# EAGLE board Station_lithobius_motenio_usb (EAGLE 9.5.2)
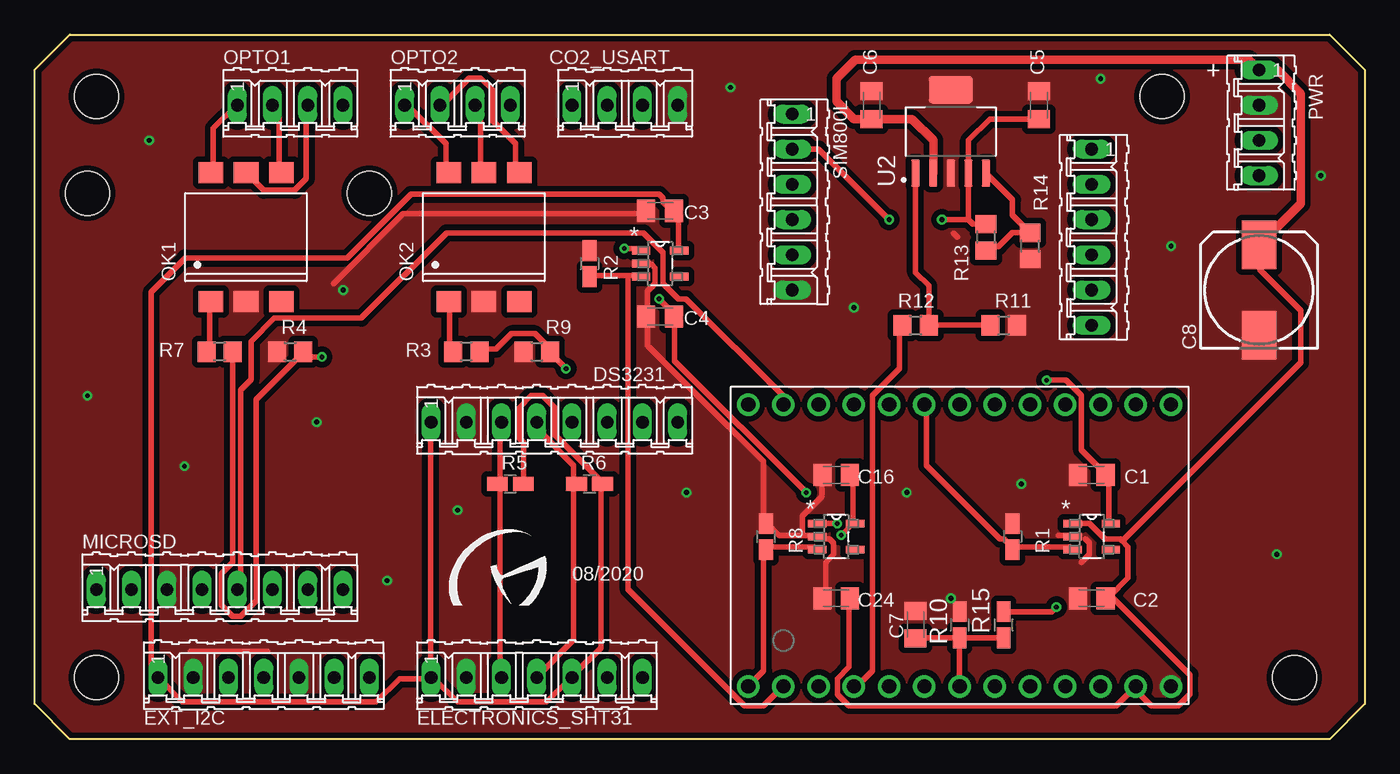
[diagram p0: board, top side]
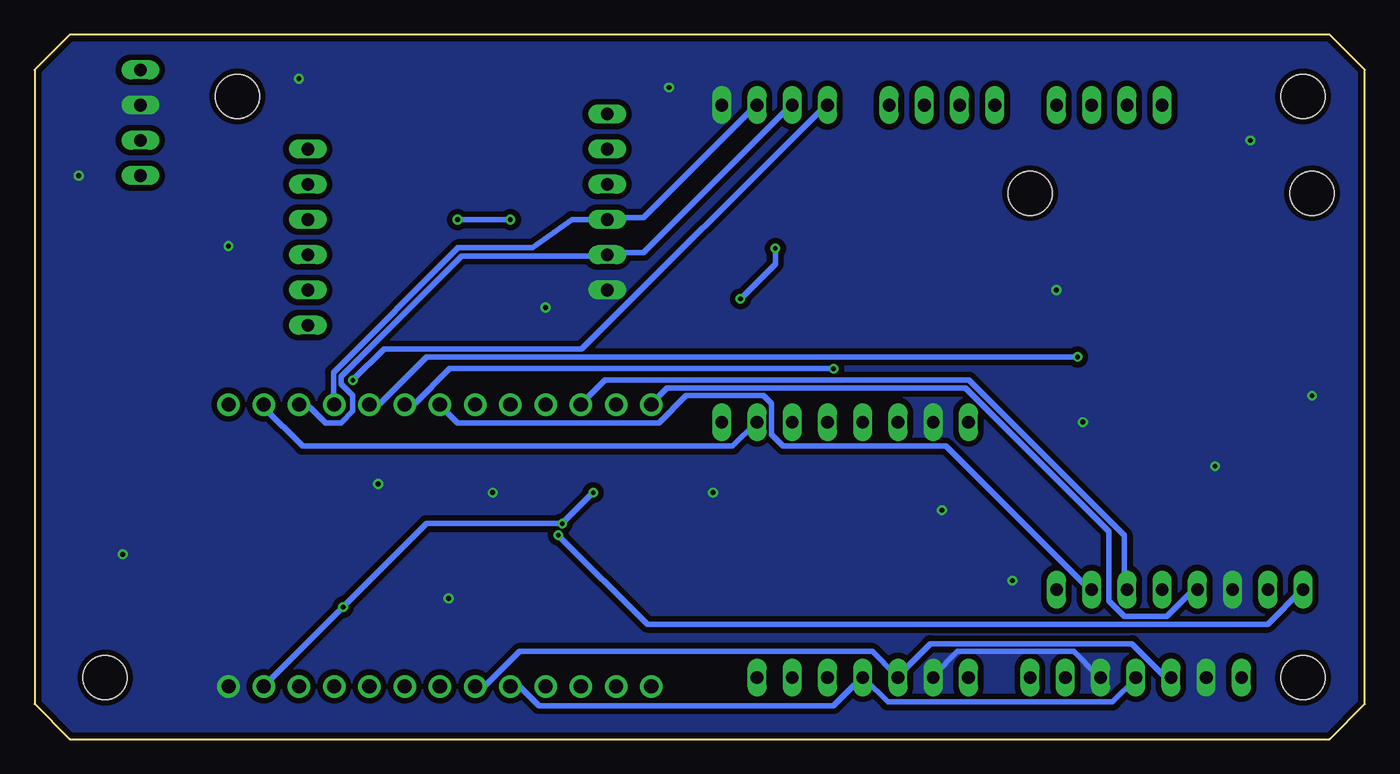
[diagram p1: board, bottom side, seen from below]

Size 95.89 x 50.8 mm. Coordinates in mm from the lower left corner, seen from the top.
Outline: 2.54,50.8 93.34,50.8 95.89,48.26 95.89,2.54 93.34,0 2.54,0 0,2.54 0,48.26 2.54,50.8
Copper layers (1*16): Top 0.0356mm / dielectric 1.5011mm / Bottom 0.0356mm
Design rules "LaenPCBOrder *": minimum track width 16mil, minimum drill 13mil, track to track 6mil, track to pad 6mil, pad to pad 6mil, via to via 6mil, smd to smd 6mil, copper to edge 15mil, drill to drill 6mil, minimum pad ring 7mil, minimum via ring 7mil, stop-mask expansion 4mil, vias tented up to drill 0mil, thermal gap 10mil
Holes 3.17 mm at 4.45,4.45 24.13,39.37 81.28,46.36 90.81,4.45 3.81,39.37 4.45,46.36

## Footprints (pad centres in the part's own frame; a part is rotated, then mirrored left to right if it is on the bottom)
C0805K = smd 1.3 x 1.6: 1 -1,0; 2 1,0
153CLV-0810 = smd 3.5 x 2.5: + 3.25,0; - -3.25,0
04P = drill 0.914 long: 1 -3.81,0; 2 -1.27,0; 3 1.27,0; 4 3.81,0
08P = drill 0.914 long: 1 -8.89,0; 2 -6.35,0; 3 -3.81,0; 4 -1.27,0; 5 1.27,0; 6 3.81,0; 7 6.35,0; 8 8.89,0
07P = drill 0.914 long: 1 -7.62,0; 2 -5.08,0; 3 -2.54,0; 4 0,0; 5 2.54,0; 6 5.08,0; 7 7.62,0
DIL6-SMD = smd 1.78 x 1.52: 1 -2.54,-4.645; 2 0,-4.645; 3 2.54,-4.645; 4 2.54,4.645; 5 0,4.645; 6 -2.54,4.645
R2012W = smd 1.5 x 1: 1 -0.94,0; 2 0.94,0
R0805 = smd 1.3 x 1.5: 1 -0.95,0; 2 0.95,0
06P = drill 0.914 long: 1 -6.35,0; 2 -3.81,0; 3 -1.27,0; 4 1.27,0; 5 3.81,0; 6 6.35,0
SOT95P270X145-5N = smd 1.321 x 0.559: 1 -1.372,0.94; 2 -1.372,0; 3 -1.372,-0.94; 4 1.372,-0.94; 5 1.372,0.94
SOT127P706X180-6N = smd 1.97 x 0.62: 1 -3.005,2.54; 2 -3.005,1.27; 3 -3.005,0; 4 -3.005,-1.27; 5 -3.005,-2.54 | smd 1.97 x 3.16: 6 3.005,0
MOTEINO_SIMPLE = drill 1.016 pad 1.626: 3V3 -10.16,10.16; A0 15.24,10.16; A1 12.7,10.16; A2 10.16,10.16; A3 7.62,10.16; A4_SDA 5.08,10.16; A5_SCL 2.54,10.16; A6_ONLY 0,10.16; A7_ONLY -2.54,10.16; D0_RXI -5.08,10.16; D1_TXO -7.62,10.16; D2 -12.7,-10.16; D3 -10.16,-10.16; D4 -7.62,-10.16; D5 -5.08,-10.16; D6 -2.54,-10.16; D7 0,-10.16; D8 2.54,-10.16; D9 5.08,-10.16; D10_SS 7.62,-10.16; D11_MOSI 10.16,-10.16; D12_MISO 12.7,-10.16; D13_SCK 15.24,-10.16; GND1 -15.24,10.16; RST -15.24,-10.16; VIN -12.7,10.16

## Placement (x,y rotation side)
C1  1uF  [C0805K]  76.2,19.05 180 top
C2  1uF  [C0805K]  76.2,10.16 180 top
C3  1uF  [C0805K]  45.09,38.1 180 top
C4  1uF  [C0805K]  45.09,30.48 180 top
C5  10uF  [C0805K]  72.39,45.72 90 top
C6  10uF  [C0805K]  60.32,45.72 90 top
C7  100nF  [C0805K]  63.5,8.25 90 top
C8  [153CLV-0810]  88.27,32.39 90 top
C16  1uF  [C0805K]  57.78,19.05 180 top
C24  1uF  [C0805K]  57.78,10.16 180 top
CO2_USART  [04P]  42.55,45.72 0 top
DS3231  [08P]  37.47,22.86 0 top
ELECTRONICS_SHT31  [07P]  36.2,4.45 0 top
EXT_I2C  [07P]  16.51,4.45 0 top
MICROSD  [08P]  13.34,10.79 0 top
OK1  H11L1MS  [DIL6-SMD]  15.24,36.2 0 top
OK2  H11L1MS  [DIL6-SMD]  32.38,36.2 0 top
OPTO1  [04P]  18.41,45.72 0 top
OPTO2  [04P]  30.48,45.72 0 top
PWR  [04P]  88.27,44.45 270 top
R1  10K  [R2012W]  70.48,14.61 270 top
R2  10K  [R2012W]  40.01,34.29 270 top
R3  [R0805]  31.12,27.94 180 top
R4  [R0805]  18.41,27.94 0 top
R5  10K  [R2012W]  34.29,18.42 0 top
R6  10K  [R2012W]  40.01,18.42 0 top
R7  [R0805]  13.34,27.94 180 top
R8  10K  [R2012W]  52.7,14.61 270 top
R9  [R0805]  36.2,27.94 0 top
R10  10K  [R2012W]  66.67,8.25 270 top
R11  [R0805]  69.85,29.85 0 top
R12  [R0805]  63.5,29.85 0 top
R13  4.7K  [R0805]  68.58,36.2 90 top
R14  2K  [R0805]  71.75,35.56 90 top
R15  10K  [R2012W]  69.85,8.25 90 top
SIM800L  [06P]  54.61,38.73 270 top
SL3  [06P]  76.2,36.2 270 top
SWITCH_I2C  MCP1755T-3302E/OT  [SOT95P270X145-5N]  45.09,34.29 0 top
SWITCH_MICROSD  MCP1755T-3302E/OT  [SOT95P270X145-5N]  57.78,14.61 0 top
SWITCH_USART  MCP1755T-3302E/OT  [SOT95P270X145-5N]  76.2,14.61 0 top
U2  TPS7A4501DCQT  [SOT127P706X180-6N]  66.04,43.82 90 top
U$1  MOTEINO_SIMPLE  [MOTEINO_SIMPLE]  66.67,13.97 180 top

## Library data of the parts
C1-C8 C16 C24 R1 R2 R5 R6 R8 R10 R15 = resistor
CO2_USART DS3231 ELECTRONICS_SHT31 EXT_I2C MICROSD OPTO1 OPTO2 PWR SIM800L SL3 = con-amp-quick; OC_FARNELL: unknown; OC_NEWARK: unknown
OK1 OK2 = optocoupler; OC_FARNELL: unknown; OC_NEWARK: unknown
R3 R4 R7 R9 R11-R14 = rcl; SPICEPREFIX: R
SWITCH_I2C SWITCH_MICROSD SWITCH_USART = Microchip-MCP1755T; MPN: MCP1755T-3302E/OT; OC_FARNELL: 2361992; OC_NEWARK: 31W8744; PACKAGE: SOT23-5; SUPPLIER: Microchip
U2 = TPS7A4501DCQT; AVAILABILITY: Unavailable; DESCRIPTION: Low-Noise Fast-Transient-Response 1.5-A Low-Dropout Voltage Regulator; DIGIKEY-PURCHASE-URL: https://snapeda.com/shop?store=DigiKey&id=548081; MF: Texas Instruments; MOUSER-PURCHASE-URL: https://snapeda.com/shop?store=Mouser&id=548081; MP: TPS7A4501DCQT; PACKAGE: SOT-223-6 Texas Instruments; PRICE: None; TEXAS_INSTRUMENTS-PURCHASE-URL: https://snapeda.com/shop?store=Texas+Instruments&id=548081
U$1 = Moteino

## Nets
+12V: C2.1 C4.1 C6.1 C8.+ C24.1 PWR.1 R15.2 SWITCH_I2C.1 SWITCH_MICROSD.1 SWITCH_USART.1 U2.2 U$1.VIN
ADDR2: C3.1 DS3231.1 ELECTRONICS_SHT31.1 ELECTRONICS_SHT31.5 EXT_I2C.1 R5.2 R6.2 SWITCH_I2C.5
CLK: MICROSD.4 U$1.D13_SCK
CS: MICROSD.7 U$1.D7
DI: MICROSD.6 U$1.D11_MOSI
DO: MICROSD.5 U$1.D12_MISO
GND: C1.2 C2.2 C3.2 C4.2 C5.2 C6.2 C7.2 C8.- C16.2 C24.2 CO2_USART.4 DS3231.2 ELECTRONICS_SHT31.2 EXT_I2C.2 EXT_I2C.5 MICROSD.3 OK1.2 OK2.2 PWR.2 R1.1 R2.1 R4.1 R8.1 R9.1 R10.1 R11.2 R14.1 SIM800L.6 SWITCH_I2C.2 SWITCH_MICROSD.2 SWITCH_USART.2 U2.3 U2.6 U$1.GND1
N$1: R11.1 R12.2 U2.1
N$2: R2.2 SWITCH_I2C.3 U$1.A1
N$3: R4.2 R7.1 U$1.D5
N$4: OK1.6 OPTO1.1
N$5: C7.1 R10.2 R15.1 U$1.A6_ONLY
N$6: R1.2 SWITCH_USART.3 U$1.D8
N$7: R3.1 R9.2 U$1.D6
N$8: OK1.4 OPTO1.2
N$9: OK1.5 OPTO1.3
N$10: OK1.1 R7.2
N$11: R12.1 U$1.A3
N$12: OK2.6 OPTO2.1
N$13: OK2.4 OPTO2.2
N$15: C5.1 R13.2 SIM800L.2 U2.4
N$16: R13.1 R14.2 U2.5
N$18: CO2_USART.3 SIM800L.4 U$1.D4
N$21: OK2.5 OPTO2.3
N$25: OK2.1 R3.2
N$42: R8.2 SWITCH_MICROSD.3 U$1.A0
SCL: DS3231.3 ELECTRONICS_SHT31.3 EXT_I2C.3 R5.1 U$1.A5_SCL
SDA: DS3231.4 ELECTRONICS_SHT31.4 EXT_I2C.4 R6.1 U$1.A4_SDA
SQW: DS3231.7 U$1.D2
TX: CO2_USART.2 SIM800L.5 U$1.D3
VIN_ON5V: C16.1 MICROSD.1 SWITCH_MICROSD.5
VIN_ON5V1: C1.1 CO2_USART.1 SWITCH_USART.5

## Tracks (layer width: path | path; a pad name or v marks a point on that pad's centre or on a via)
+12V  (via drill 0.33, 0.35)
  Top 0.406: 88.32,35.66 C8.+ 88.32,35.38 88.32,33.86 91.26,30.91 91.26,27.15 78.4,14.29 | SWITCH_USART.1 76.02,15.54 77.14,14.43 78.26,14.43 78.4,14.29 | 78.4,14.29 78.82,13.87 78.82,11.63 77.42,10.24 C2.1 77.7,10.24 83.29,4.65 83.29,3.25 82.45,2.41 80.49,2.41 79.38,3.53 U$1.VIN 77.98,2.41 58.7,2.41 57.86,3.25 57.86,4.37 58.7,5.21 58.7,9.96 C24.1 | v42.49,35.38 43.61,35.38 SWITCH_I2C.1 | v45.01,31.75 46.13,30.63 C4.1 46.13,30.35 46.13,27.28 v55.63,17.78 | v57.86,15.54 SWITCH_MICROSD.1 | R15.2 73.33,9.2 v73.66,9.53
  Top 0.61: 88.32,35.66 91.26,38.61 91.26,46.56 89.56,48.26 PWR.1 87.53,49 59.16,49 57.78,47.62 57.78,45.99 59.05,44.72 C6.1 63.23,44.72 64.77,43.18 U2.2
  Bottom 0.406: v42.49,35.38 42.49,34.27 v45.01,31.75 | U$1.VIN v73.66,9.53 67.64,15.54 v57.86,15.54 v55.63,17.78
ADDR2
  Top 0.406: R5.2 35.23,18.62 35.23,21.41 34.95,21.69 34.95,23.93 35.79,24.77 36.63,24.77 37.47,23.93 37.47,21.97 40.82,18.62 R6.2 40.82,18.34 40.82,6.6 38.86,4.65 ELECTRONICS_SHT31.5 38.58,4.37 36.91,2.69 30.48,2.69 28.8,4.37 ELECTRONICS_SHT31.1 | DS3231.1 28.52,22.81 28.52,4.65 ELECTRONICS_SHT31.1 | SWITCH_I2C.5 46.41,35.38 46.41,37.62 46.13,37.9 C3.1 45.85,38.18 45.29,38.73 45.29,39.01 45.01,39.29 27.13,39.29 22.53,34.7 10.85,34.7 8.41,32.26 8.41,4.93 EXT_I2C.1 10.64,2.69 24.61,2.69 26.29,4.37 28.52,4.37 ELECTRONICS_SHT31.1
CLK
  Bottom 0.406: MICROSD.4 12.32,10.79 14.28,8.84 17.35,8.84 18.47,9.96 18.47,14.99 28.8,25.32 50.32,25.32 51.43,24.21 U$1.D13_SCK
CS
  Bottom 0.406: MICROSD.7 19.86,10.79 30.2,21.13 41.93,21.13 42.77,21.97 42.77,24.21 43.33,24.77 48.92,24.77 50.88,22.81 65.41,22.81 66.52,23.93 U$1.D7
DI
  Bottom 0.406: MICROSD.6 17.35,10.79 17.35,14.71 28.52,25.88 54.79,25.88 56.46,24.21 U$1.D11_MOSI
DO
  Top 0.406: MICROSD.5 14.83,10.79 14.83,25.17 15.6,25.93 15.6,28.68 17.27,30.35 23.55,30.35 29.69,36.5 43.89,36.5 45.29,35.1 45.29,32.87 46.41,31.75 46.96,31.75 53.95,24.77 53.95,24.21 U$1.D12_MISO
GND  (via drill 0.35)
  Top 0.406: 88.04,45.72 PWR.2 | 88.04,29.24 C8.- | 73.79,14.71 74.62,14.71 SWITCH_USART.2 | 70.71,15.54 R1.1 | 75.46,12.75 76.02,13.31 76.02,14.15 75.74,14.43 | 75.46,10.24 C2.2 75.18,9.96 | 75.18,18.9 C1.2 75.18,19.18 | 81.33,3.81 U$1.GND1 | 55.35,14.71 53.67,14.71 52.83,15.54 R8.1 52.55,15.82 52.55,20.02 44.17,28.4 44.17,30.35 C4.2 44.17,30.63 44.17,32.31 44.73,32.87 44.73,33.98 44.45,34.27 43.89,34.27 SWITCH_I2C.2 | 55.35,14.71 56.18,14.71 SWITCH_MICROSD.2 56.46,14.43 57.3,14.43 57.58,14.15 57.58,13.31 57.02,12.75 57.02,10.24 C24.2 | 55.35,14.71 55.35,16.1 56.74,17.5 56.74,18.9 C16.2 56.74,19.18 | 21.54,32.87 26.57,37.9 43.89,37.9 C3.2 | 15.39,31.75 OK1.2 15.11,31.75 | 11.2,6.32 16.79,6.32 | 40.26,35.1 R2.1 39.98,35.1 | 32.44,31.75 OK2.2 32.16,31.75 | 17.63,28.12 R4.1 | 31.04,4.65 ELECTRONICS_SHT31.2 | 9.8,10.79 MICROSD.3 | 66.52,36.22 66.24,36.5
  Bottom 0.406: ELECTRONICS_SHT31.2 31.04,4.65 29.36,6.32 20.98,6.32 19.3,4.65 EXT_I2C.5
  other vias: 8.26,43.18 3.81,24.77 10.79,19.68 20.32,22.86 25.4,11.43 30.48,16.51 46.99,17.78 62.87,17.78 66.04,10.16 89.54,13.34 71.12,18.42 92.71,40.64 81.92,35.56 22.23,32.39 76.84,47.62 59.05,31.11 50.16,46.99
  pour Top (isolate 0.406, no thermals): -3.17,52.07 97.79,52.07 97.79,-2.54 -3.17,-2.54
  pour Bottom (isolate 0.406, no thermals): -4.45,52.7 97.16,52.7 97.16,-0.63 -5.08,-0.63 -5.08,52.7
N$1
  Top 0.406: U2.1 63.5,33.66 64.45,32.7 R12.2 R11.1
N$2
  Top 0.406: 42.77,33.43 40.26,33.43 R2.2 | 42.77,33.43 43.61,33.43 SWITCH_I2C.3 | 42.77,33.43 42.77,10.79 51.16,2.41 52.55,2.41 53.95,3.81 U$1.A1
N$3  (via drill 0.33)
  Top 0.406: R7.1 14.28,27.84 14.28,12.75 13.44,11.91 13.44,9.68 14.28,8.84 14.83,8.84 15.95,9.96 15.95,24.49 19.3,27.84 R4.2 19.3,27.56 v20.7,27.56
  Bottom 0.406: v20.7,27.56 67.64,27.56 70.99,24.21 71.55,24.21 U$1.D5
N$4
  Top 0.406: OK1.6 12.88,40.97 12.88,44.04 14.55,45.72 OPTO1.1
N$5
  Top 0.406: U$1.A6_ONLY R10.2 | R10.2 63.56,7.32 C7.1 | R10.2 R15.1
N$6
  Top 0.406: SWITCH_USART.3 74.62,13.87 70.71,13.87 R1.2 70.43,13.87 69.88,14.43 69.6,14.43 64.29,19.74 64.29,23.93 U$1.D8
N$7  (via drill 0.33)
  Top 0.406: R3.1 32.16,28.12 33.27,28.12 34.39,29.24 36.07,29.24 37.19,28.12 R9.2 37.19,27.84 v38.3,26.72
  Bottom 0.406: v38.3,26.72 65.96,26.72 68.48,24.21 69.04,24.21 U$1.D6
N$8
  Top 0.406: OK1.4 17.63,40.97 17.63,45.44 17.35,45.72 OPTO1.2
N$9
  Top 0.406: OK1.5 15.39,40.69 16.51,39.57 18.75,39.57 19.58,40.41 19.58,45.72 OPTO1.3
N$10
  Top 0.406: R7.2 12.6,28.12 12.6,31.47 OK1.1
N$11
  Top 0.406: R12.1 62.33,29.79 62.33,26.72 60.38,24.77 60.38,4.93 59.26,3.81 U$1.A3
N$12
  Top 0.406: OK2.6 29.64,40.97 29.64,42.93 26.85,45.72 OPTO2.1
N$13
  Top 0.406: OK2.4 34.67,40.97 34.67,42.93 32.99,44.6 32.99,46.84 32.16,47.68 31.32,47.68 29.36,45.72 OPTO2.2
N$15  (via drill 0.35)
  Top 0.406: R13.2 67.63,37.15 67.31,37.47 | C5.1 68.85,44.72 67.31,43.18 U2.4 67.31,37.47 | SIM800L.2 56.52,42.55 v61.59,37.47 | 67.31,37.47 v65.41,37.47
  Bottom 0.406: v65.41,37.47 v61.59,37.47
N$16
  Top 0.406: U2.5 70.48,38.91 70.48,37.78 R14.2 70.48,36.51 69.48,35.5 68.84,35.5 R13.1
N$18
  Bottom 0.406: CO2_USART.3 43.89,45.72 51.99,37.62 54.51,37.62 SIM800L.4 57.15,37.47 59.99,35.43 65.35,35.43 74.35,26.44 74.35,24.21 U$1.D4
N$21
  Top 0.406: OK2.5 32.16,40.97 32.16,45.44 31.88,45.72 OPTO2.3
N$25
  Top 0.406: R3.2 29.92,28.12 29.92,31.47 OK2.1
N$42
  Top 0.406: SWITCH_MICROSD.3 56.18,13.87 52.83,13.87 R8.2 52.55,13.59 52.55,4.93 U$1.A0
SCL
  Top 0.406: DS3231.3 33.55,22.81 33.55,18.62 R5.1 33.55,18.34 33.55,4.65 ELECTRONICS_SHT31.3
  Bottom 0.406: EXT_I2C.3 14,4.65 14.55,4.65 16.79,6.88 31.32,6.88 33.55,4.65 ELECTRONICS_SHT31.3 33.83,4.65 35.51,6.32 60.93,6.32 63.45,3.81 U$1.A5_SCL
SDA
  Top 0.406: DS3231.4 36.35,22.81 36.35,22.25 38.86,19.74 38.86,18.62 R6.1 38.86,18.34 38.86,7.16 36.35,4.65 ELECTRONICS_SHT31.4
  Bottom 0.406: EXT_I2C.4 16.51,4.37 18.19,2.69 34.39,2.69 36.07,4.37 ELECTRONICS_SHT31.4 36.35,4.37 38.3,2.41 59.54,2.41 60.93,3.81 U$1.A4_SDA
SQW
  Bottom 0.406: DS3231.7 43.89,22.81 45.57,21.13 76.58,21.13 79.38,23.93 U$1.D2
TX
  Bottom 0.406: CO2_USART.2 41.38,45.72 51.99,35.1 54.51,35.1 SIM800L.5 54.79,34.82 65.13,34.82 73.79,26.16 73.79,25.6 72.95,24.77 72.95,23.65 73.79,22.81 74.91,22.81 76.02,23.93 76.58,23.93 U$1.D3
VIN_ON5V  (via drill 0.33)
  Top 0.406: 58.98,15.54 58.98,18.9 C16.1 | 58.98,15.54 v58.14,14.71 | 58.98,15.54 SWITCH_MICROSD.5
  Bottom 0.406: v58.14,14.71 51.71,8.28 7.01,8.28 4.5,10.79 MICROSD.1
VIN_ON5V1  (via drill 0.33)
  Top 0.406: SWITCH_USART.5 77.42,15.54 77.42,18.9 C1.1 77.14,19.18 75.46,20.85 75.46,24.77 74.35,25.88 v72.95,25.88
  Bottom 0.406: v72.95,25.88 70.71,28.12 56.46,28.12 38.86,45.72 CO2_USART.1

## Text on the board
tNames: + | 08/2020